# Altium PCB ff.PcbDoc
Units mm, origin at the board's own origin, x right, y up, seen from the top; angles counter-clockwise.
Board outline 200.03 x 100.08 mm, 2 copper layers (Top Layer, Bottom Layer); 74 components, 48 nets, 189 pads, 0 vias.
Unrouted connection lines stored in the file: 140.
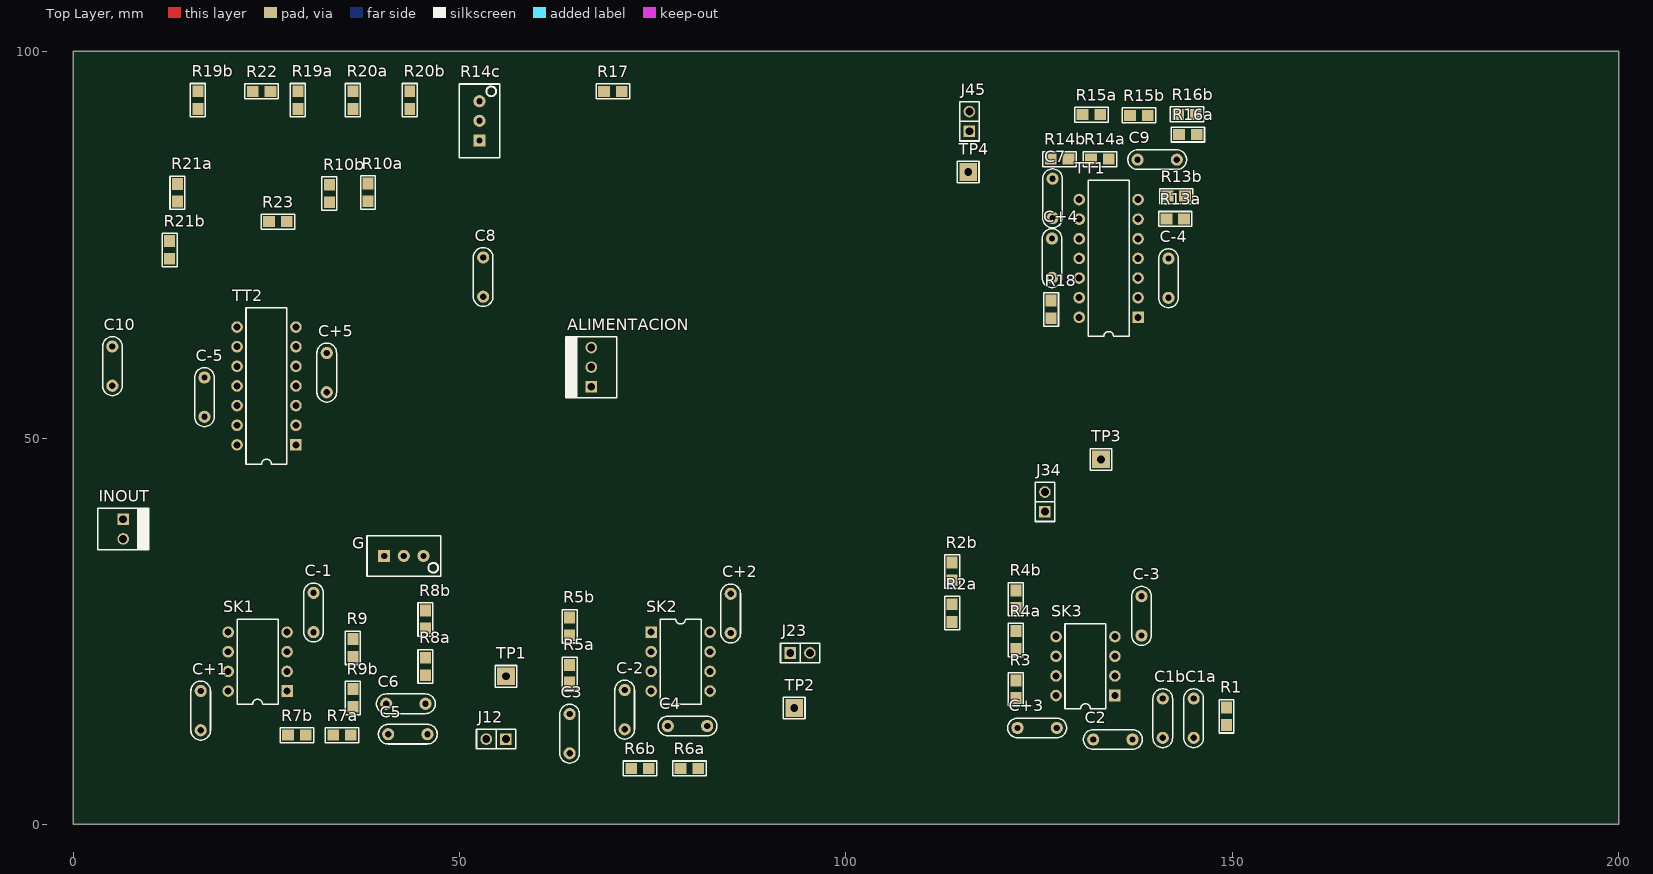
[diagram p0: Top Layer view]
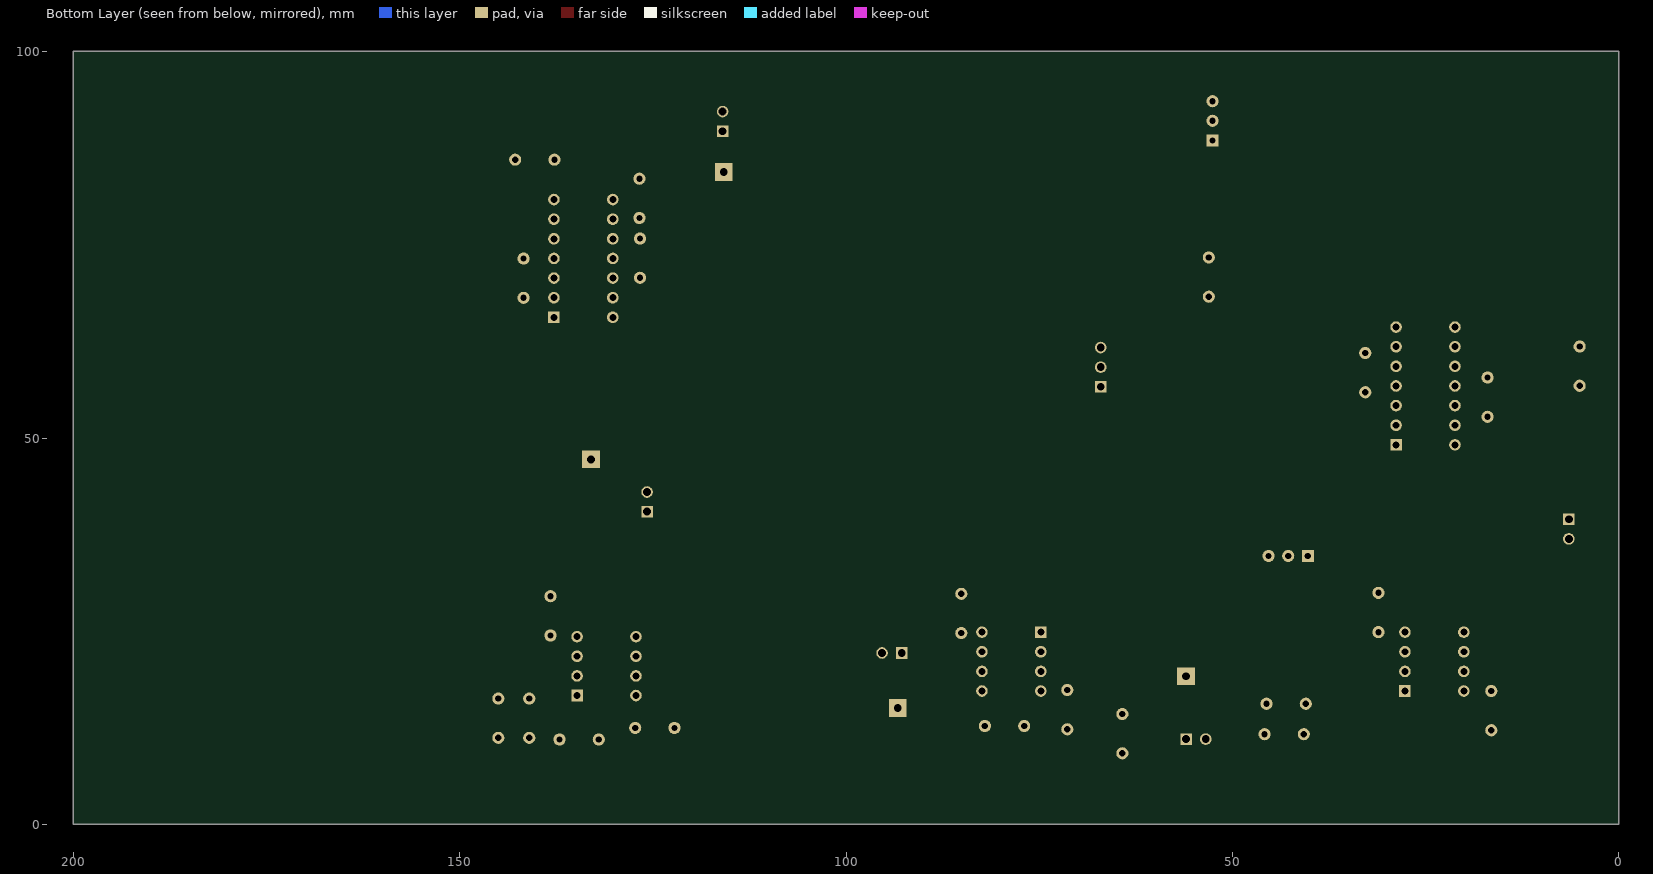
[diagram p1: Bottom Layer view, seen from below]

## Layer stack, top to bottom
Top Solder: solder mask 0.0102, Solder Resist, Dk 3.5
Top Layer: signal copper 0.0356
Dielectric 1: dielectric 0.32, FR-4, Dk 4.8
Bottom Layer: signal copper 0.0356
Bottom Solder: solder mask 0.0102, Solder Resist, Dk 3.5

## Board outline
0,0 200.025,0 200.025,100.076 0,100.076

## Design rules (kind name [scope] priority, off if disabled: settings)
Clearance [All] p1: gap=0.254 ignorepadtopadclearanceinfootprint=FALSE except(0: Arc-Hole Track-Hole SMDPad-Hole THPad-Hole Via-Hole Fill-Hole Poly-Hole Region-Hole Text-Hole)
PolygonConnect [All] p1: connectstyle=Relief reliefconductorwidth=0.254 reliefentries=4 polygonreliefangle="90 Angle" airgapwidth=0.254
RoutingVias [All] p1: holewidth=0.711 width=1.27 viastyle="Through Hole" minholewidth=0.711 minwidth=1.27 maxholewidth=0.711 maxwidth=1.27
SolderMaskExpansion [All] p1: expansion=0.102
Width [All] p1: maxlimit=0.254 minlimit=0.254 preferedwidth=0.254
30 further rules are at their usual default settings.

## Components (designator, comment, footprint, x,y, rotation, side; value= is the part's Value field where it differs from the comment)
ALIMENTACION "MOLEX3" MOLEX3 67.056,56.642 r90 top
C1a "10n" CAP200 145,13.75 r270 top
C1b "1n" CAP200 141,13.75 r270 top
C2 "10n" CAP200 134.54,11 r180 top
C3 "10n" CAP200 64.25,11.75 r270 top
C4 "10n" CAP200 79.5,12.75 r0 top
C5 "10n" CAP200 43.307,11.684 r180 top
C6 "10n" CAP200 43.053,15.621 r180 top
C7 "10n" CAP200 126.746,81.026 r90 top
C8 "1n" CAP200 53.061,70.841 r90 top
C9 "10n" CAP200 140.284,86.03 r180 top
C10 "1n" CAP200 5.08,59.309 r90 top
C+1 "CAP" CAP200 16.51,14.732 r270 top
C+2 "CAP" CAP200 85.09,27.305 r90 top
C+3 "CAP" CAP200 124.75,12.5 r180 top
C+4 "CAP" CAP200 126.67,73.279 r270 top
C+5 "CAP" CAP200 32.817,58.471 r90 top
C-1 "CAP" CAP200 31.115,27.432 r270 top
C-2 "CAP" CAP200 71.374,14.859 r90 top
C-3 "CAP" CAP200 138.25,27 r270 top
C-4 "CAP" CAP200 141.732,70.688 r90 top
C-5 "CAP" CAP200 16.993,55.296 r90 top
G "PRESET" "PRESET V" 42.79,34.75 r0 top
INOUT "MOLEX2" MOLEX2 6.477,39.497 r270 top
J12 "CON2" SIP2 54.737,11.049 r180 top
J23 "CON2" SIP2 94.075,22.194 r0 top
J34 "CON2" SIP2 125.75,41.75 r90 top
J45 "CON2" SIP2 115.976,90.983 r90 top
R1 "1k2" 0805 149.25,14 r90 top
R2a "1k" 0805 113.75,27.357 r270 top
R2b "560" 0805 113.75,32.75 r270 top
R3 "1k" 0805 122,17.5 r90 top
R4a "910R" 0805 122,23.893 r270 top
R4b "150R" 0805 122,29.143 r270 top
R5a "2k" 0805 64.25,19.5 r90 top
R5b "150R" 0805 64.25,25.643 r90 top
R6a "24k" 0805 79.75,7.25 r0 top
R6b "300R" 0805 73.357,7.25 r0 top
R7a "3k3" 0805 34.798,11.557 r180 top
R7b "1k2" 0805 28.956,11.557 r0 top
R8a "3k3" 0805 45.593,20.447 r90 top
R8b "1k2" 0805 45.593,26.543 r270 top
R9 "3k3" 0805 36.195,22.86 r90 top
R9b "1k2" 0805 36.195,16.383 r270 top
R10a "62k" 0805 38.157,81.796 r90 top
R10b "910k" 0805 33.157,81.653 r90 top
R13a "51k" 0805 142.621,78.359 r0 top
R13b "3k9" 0805 142.748,81.305 r180 top
R14a "8k2" 0805 132.867,86.106 r180 top
R14b "0" 0805 127.66,86.106 r180 top
R14c "PRESET" "PRESET V" 52.578,91.059 r90 top
R15a "510R" 0805 131.775,91.846 r0 top
R15b "3k3" 0805 137.922,91.77 r0 top
R16a "10k" 0805 144.247,89.281 r0 top
R16b "470k" 0805 144.139,91.89 r0 top
R17 "10k" 0805 69.85,94.869 r0 top
R18 "10k" 0805 126.543,66.65 r270 top
R19a "12k" 0805 29.083,93.726 r90 top
R19b "75k" 0805 16.129,93.726 r90 top
R20a "RES" 0805 36.195,93.726 r90 top
R20b "RES" 0805 43.561,93.726 r90 top
R21a "75k" 0805 13.5,81.75 r90 top
R21b "12k" 0805 12.5,74.357 r90 top
R22 "10k" 0805 24.384,94.869 r0 top
R23 "10k" 0805 26.5,78 r0 top
SK1 "TL082ACN" DIP8 23.876,21.082 r90 top
SK2 "TL082ACN" DIP8 78.613,21.082 r270 top
SK3 "TL082ACN" DIP8 131,20.5 r90 top
TP1 "TP" TPTH 56.007,19.177 r0 top
TP2 "TP" TPTH 93.313,15.082 r0 top
TP3 "TP" TPTH 133,47.25 r0 top
TP4 "TP" TPTH 115.824,84.43 r0 top
TT1 "TL084ACN" DIP14 134,73.25 r90 top
TT2 "TL084ACN" DIP14 25.019,56.744 r90 top

## Footprints (in the part's own frame and the unit in brackets; to place one, negate y for a bottom-side part, rotate by r counter-clockwise, add the part's x,y. Pads: shape width x height; smd on the part's side, far side on the other; paste and mask are expansions set on the pad)
0805 [mil] "Pasivo 0805"
  rect 60x56 smd: 1(-45,0) 2(45,0)
  silkscreen extent -85,-38 85,38, body extent -40,-25 39,25, height 15
CAP200 [mil]
  round 62 hole 32: 1(-100,0) 2(100,0)
  silkscreen extent -150,-50 150,50, body extent -110,-46 110,44, height 246
DIP8 [mm] "DIP; 8 Leads; Row Spacing 7.62 mm; Pitch 2.54 mm"
  rect 1.5x1.5 hole 0.9: 1(-3.81,-3.81)
  round 1.5 hole 0.9: 2(-1.27,-3.81) 3(1.27,-3.81) 4(3.81,-3.81) 5(3.81,3.81) 6(1.27,3.81) 7(-1.27,3.81) 8(-3.81,3.81)
  silkscreen extent -5.5,-2.65 5.5,2.65
DIP14 [mm] "DIP; 14 Leads; Row Spacing 7.62 mm; Pitch 2.54 mm"
  rect 1.5x1.5 hole 0.9: 1(-7.62,-3.81)
  round 1.5 hole 0.9: 2(-5.08,-3.81) 3(-2.54,-3.81) 4(0,-3.81) 5(2.54,-3.81) 6(5.08,-3.81) 7(7.62,-3.81) 8(7.62,3.81) 9(5.08,3.81) 10(2.54,3.81) 11(0,3.81) 12(-2.54,3.81) 13(-5.08,3.81) 14(-7.62,3.81)
  silkscreen extent -10.1,-2.65 10.1,2.65
MOLEX2 [mm]
  rect 1.5x1.5 hole 1.016: 1(0,0)
  round 1.5 hole 1.016: 2(2.54,0)
  silkscreen extent -1.4,-3.3 3.94,3.3, body extent -1.27,-3.18 3.81,3.18, height 10.74
MOLEX3 [mm]
  rect 1.5x1.5 hole 1.016: 1(0,0)
  round 1.5 hole 1.016: 2(2.54,0) 3(5.08,0)
  silkscreen extent -1.4,-3.3 6.48,3.3, body extent -1.27,-3.17 6.35,3.18, height 10.74
"PRESET V" [mil]
  rect 62x62 hole 32: 1(-100,0)
  round 62 hole 32: 2(0,0) 3(100,0)
  silkscreen extent -188,-102 188,102, body extent -185,-95 190,95, height 455
SIP2 [mm]
  rect 1.5x1.5 hole 1.016: 1(-1.27,0)
  round 1.5 hole 1.016: 2(1.27,0)
  silkscreen extent -2.54,-1.27 2.54,1.27
TPTH [mm]
  rect 2.3x2.3 hole 1.016: 1(0,0)
  silkscreen extent -1.4,-1.4 1.4,1.4, body extent -1.27,-1.27 1.27,1.27, height 6.04

## Part data
C1a C1b C2 C3 C4 C5 C6 C7 C8 C9 C10: library part CAP
R1 R2a R2b R3 R4a R4b R5a R5b R6a R6b R7a R7b R8a R8b R9 R9b R10a R10b R13a R13b R14a R14b R15a R15b R16a R16b R17 R18 R19a R19b R21a R21b R22 R23: library part RES
SK1 SK2 SK3: "General-Purpose J-FET Dual Operational Amplifier", Code_JEDEC=MO-001-AN, ComponentLink1Description="Manufacturer Link", ComponentLink1URL=http://www.st.com/, ComponentLink2Description=Datasheet, ComponentLink2URL=http://www.st.com/stonline/products/literature/ds/2300/tl082.pdf, DatasheetVersion=Jan-1999, LatestRevisionDate=06-Jun-2005, LatestRevisionNote="Stylized 3D Model Added.", PackageDescription="DIP; 8 Leads; Row Spacing 7.62 mm; Pitch 2.54 mm", PackageReference=DIP8, Published=24-Aug-2001, Publisher="Altium Limited"
TT1 TT2: "General-Purpose J-FET Quad Operational Amplifier", ComponentLink1Description="Manufacturer Link", ComponentLink1URL=http://www.st.com/, ComponentLink2Description=Datasheet, ComponentLink2URL=http://www.st.com/stonline/products/literature/ds/2301/tl084.pdf, DatasheetVersion=Jan-1999, LatestRevisionDate=06-Jun-2005, LatestRevisionNote="Stylized 3D Model Added.", PackageDescription="DIP; 14 Leads; Row Spacing 7.62 mm; Pitch 2.54 mm", PackageReference=DIP14, PackageVersion=Jan-1997, Published=24-Aug-2001, Publisher="Altium Limited"

## Nets (pads, with @x,y where several pads share a name; then routed paths per layer and width w, separated by ;. In a path a pad name is that pad's centre, name@x,y a point inside that pad or via, vN(x,y) a via of type N, cw(c..) or ccw(c..) an arc to the next point about the centre after c; other vN are vias at no path point)
GND: ALIMENTACION.2 C5.1 C+1.2 C+2.2 C+3.2 C+4.2 C+5.2 C-1.1 C-2.1 C-3.1 C-4.1 C-5.1 G.1 R2b.1 R3.1 R6b.1 R8b.1 TT1.5 TT1.10 TT1.12 TT2.5 TT2.10 TT2.12
IN1: INOUT.1 SK1.5
IN2: J12.2 SK2.3
IN3: J23.2 SK3.3
IN4: J34.2 TT1.3
IN5: J45.2 TT2.3
NetC1a_1: C1a.1 C1b.1 SK3.1 SK3.2
NetC1a_2: C1a.2 C1b.2 C2.1 R1.1
NetC2_2: C2.2 R2a.2 SK3.5
NetC3_1: C3.1 R5a.1 SK2.1 SK2.2
NetC3_2: C3.2 C4.1
NetC4_2: C4.2 R6a.2 SK2.5
NetC5_2: C5.2 C6.2 R7a.1 R9b.2
NetC6_1: C6.1 R8a.2 SK1.3
NetC7_1: C7.1 R14c.3 TT1.9
NetC7_2: C7.2 R17.1 TT1.8
NetC8_1: C8.1 R19a.2 R19b.2 TT2.9
NetC8_2: C8.2 R22.1 TT2.8
NetC9_1: C9.1 R13a.1 R15b.2 R16a.1 R16b.1 TT1.6
NetC9_2: C9.2 R13b.2 R14a.1 TT1.7
NetC10_1: C10.1 R10a.1 R10b.1 R20b.2 R21a.1 R21b.1 TT2.6
NetC10_2: C10.2 R10a.2 R10b.2 R19a.1 R19b.1 TT2.7
NetG_2: G.2 SK1.2
NetR2a_1: R2a.1 R2b.2
NetR3_2: R3.2 R4a.2 SK3.6
NetR4a_1: R4a.1 R4b.2
NetR5a_2: R5a.2 R5b.1
NetR6a_1: R6a.1 R6b.2
NetR7a_2: R7a.2 R7b.2
NetR8a_1: R8a.1 R8b.2
NetR9_1: R9.1 R9b.1
NetR9_2: R9.2 SK1.6 SK1.7
NetR13a_2: R13a.2 R13b.1
NetR14a_2: R14a.2 R14b.1
NetR14b_2: R14b.2 R14c.2
NetR15a_1: R15a.1 TT1.1 TT1.2
NetR15a_2: R15a.2 R15b.1
NetR17_2: R17.2 R18.1 TT1.13
NetR20a_1: R20a.1 TT2.1 TT2.2
NetR20a_2: R20a.2 R20b.1
NetR22_2: R22.2 R23.1 TT2.13
OUT1: G.3 J12.1 R7b.1 SK1.1 TP1.1
OUT2: J23.1 R5b.2 SK2.6 SK2.7 TP2.1
OUT3: J34.1 R1.2 R4b.1 SK3.7 TP3.1
OUT4: J45.1 R16a.2 R16b.2 R18.2 TP4.1 TT1.14
OUT5: INOUT.2 R21a.2 R21b.2 R23.2 TT2.14
VCC: ALIMENTACION.1 C+1.1 C+2.1 C+3.1 C+4.1 C+5.1 SK1.8 SK2.8 SK3.8 TT1.4 TT2.4
VEE: ALIMENTACION.3 C-1.2 C-2.2 C-3.2 C-4.2 C-5.2 SK1.4 SK2.4 SK3.4 TT1.11 TT2.11
pads on no net: R14c.1